# Altium PCB 智能家居-温湿度传感器.PcbDoc
Units mm, origin at the board's own origin, x right, y up, seen from the top; angles counter-clockwise.
Board outline 61.77 x 59.99 mm, 2 copper layers (Top Layer, Bottom Layer); 17 components, 26 nets, 91 pads, 0 vias.
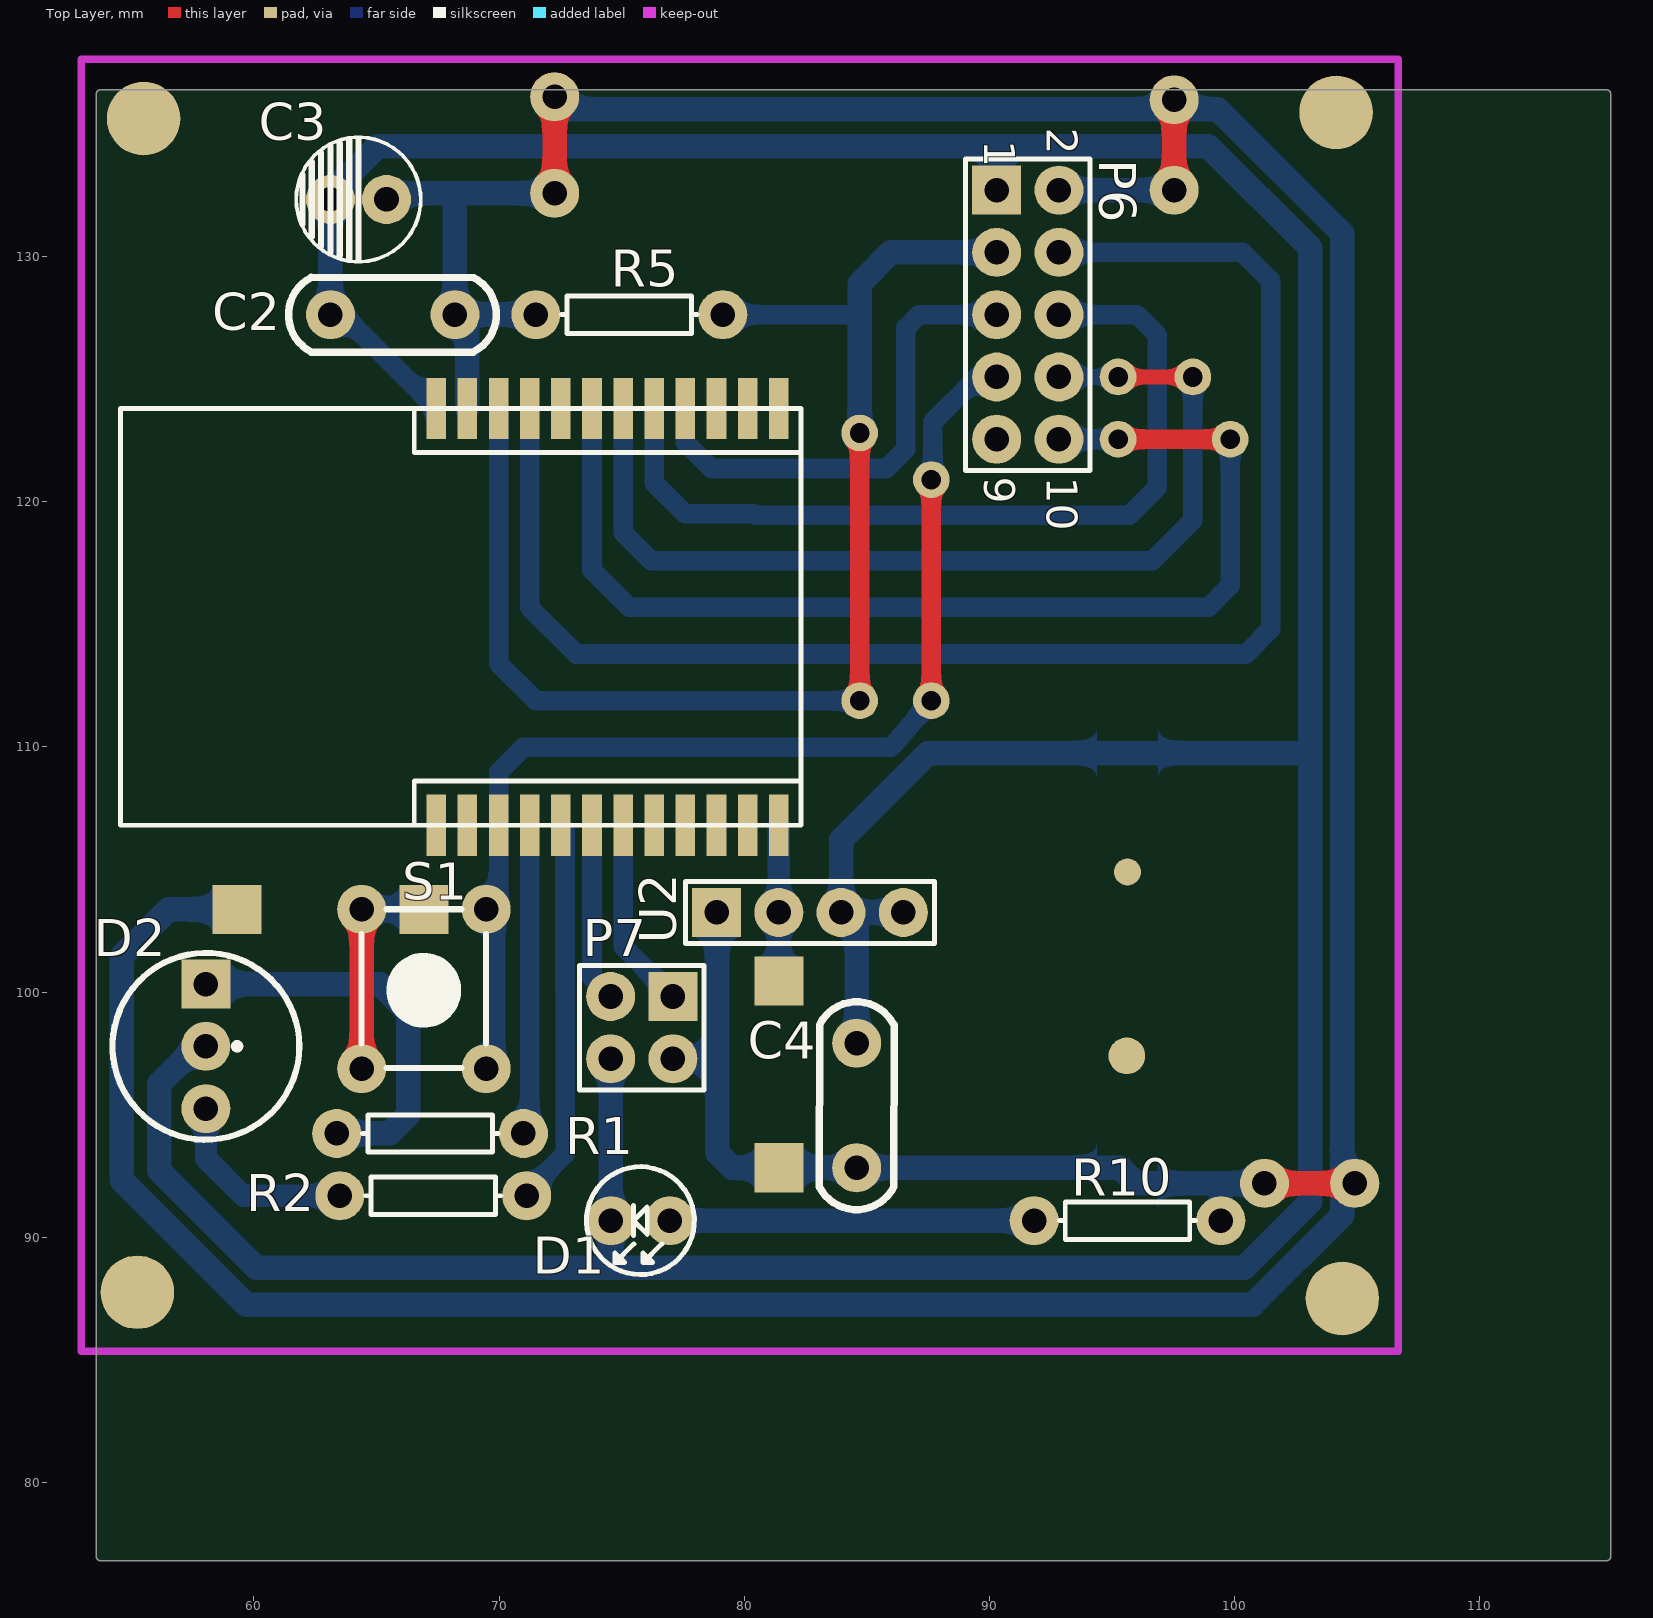
[diagram p0: Top Layer view]
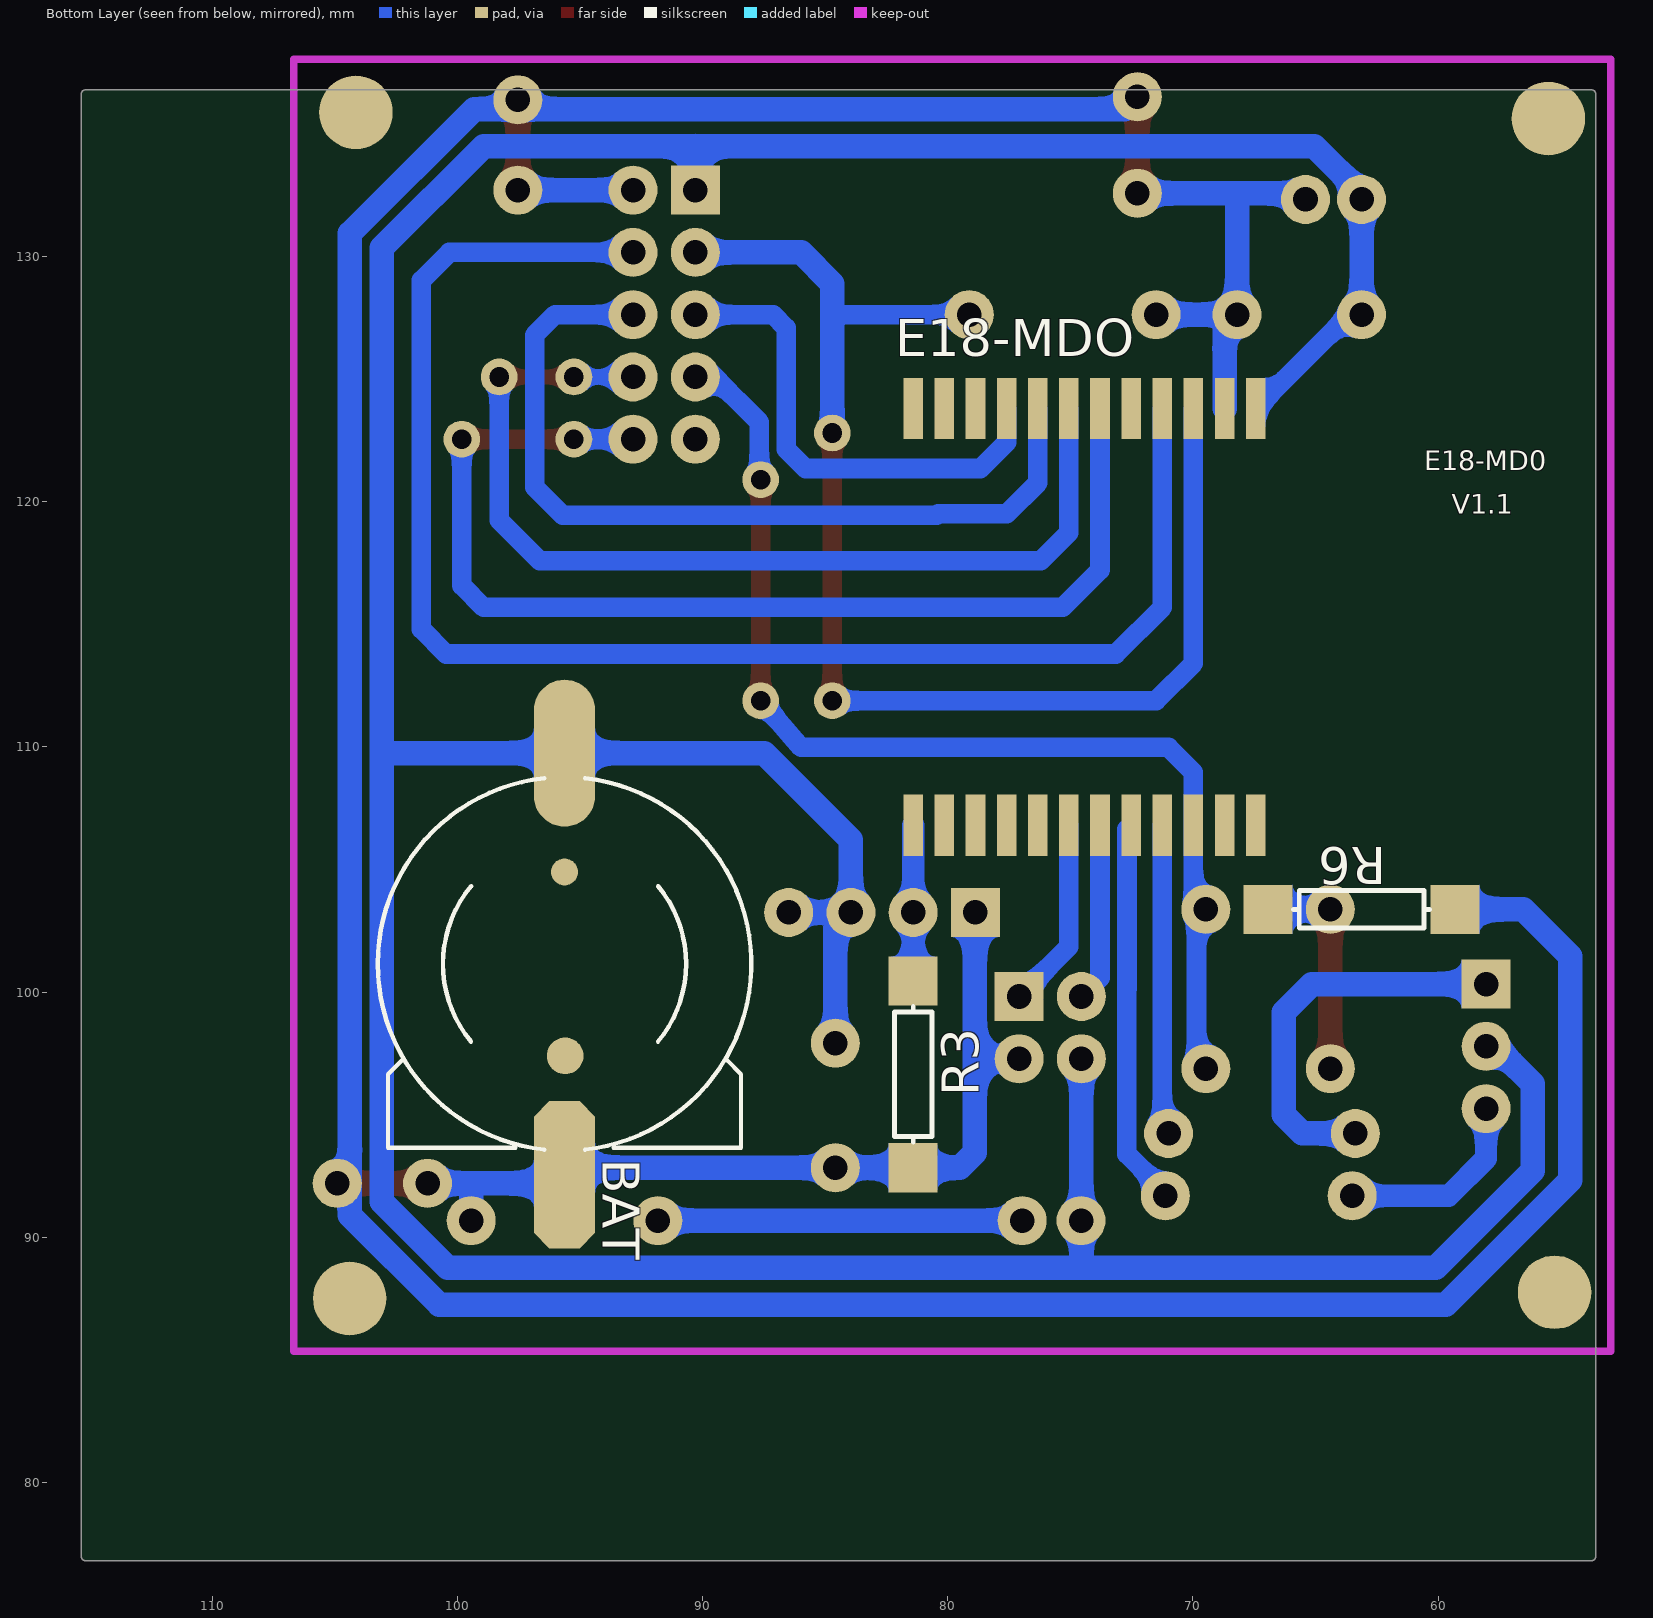
[diagram p1: Bottom Layer view, seen from below]

## Layer stack, top to bottom
Top Solder: solder mask 0.0102, Solder Resist, Dk 3.5
Top Layer: signal copper 0.0356
Dielectric 1: dielectric 0.32, FR-4, Dk 4.8
Bottom Layer: signal copper 0.0356
Bottom Solder: solder mask 0.0102, Solder Resist, Dk 3.5

## Board outline
53.721,76.812 cw(c53.721,76.962) 53.571,76.962 53.571,136.652 cw(c53.721,136.652) 53.721,136.802 115.189,136.802 cw(c115.189,136.652) 115.339,136.652 115.339,76.962 cw(c115.189,76.962) 115.189,76.812

## Design rules (kind name [scope] priority, off if disabled: settings)
Clearance [All] p1: gap=0.3
PolygonConnect [All] p1: connectstyle=Relief reliefconductorwidth=0.254 reliefentries=4 polygonreliefangle="90 Angle" airgapwidth=0.254
RoutingVias [All] p1: holewidth=1 width=2 viastyle="Through Hole" minholewidth=0.711 minwidth=1.27 maxholewidth=0.711 maxwidth=1.27
SolderMaskExpansion [All] p1: expansion=0.102
Width [All] p1: maxlimit=5 minlimit=0.5 preferedwidth=0.8 minimp=50.000000 maximp=50.000000 favimp=50.000000
30 further rules are at their usual default settings.

## Components (designator, comment, footprint, x,y, rotation, side; value= is the part's Value field where it differs from the comment)
BAT "BATT" BATM 95.631,101.154 r180 bottom
C2 "0.01uF" 0.1UF 65.659,127.635 r180 top
C3 "Cap Pol1" CD5 65.405,132.334 r270 top
C4 "104" 0.1UF 84.582,95.377 r270 top
D1 "LED0" LED-3 76.962,90.678 r180 top
D2 "RG-LED-K" RG-LED 58.039,100.33 r270 top
E18-MDO "Zigbee" E18-MD0-1 81.407,122.907 r180 bottom
P6 "程序下载接口" HDR2X5 90.297,132.715 r270 top
P7 "调试接口" HDR2X2 77.089,99.822 r180 top
R1 "100" AXIAL-0.3#1 67.183,94.234 r0 top
R2 "100" AXIAL-0.3#1 67.31,91.694 r0 top
R3 "4.7K" AXIAL-0.3#2 81.407,96.647 r90 bottom
R5 "4.7K" AXIAL-0.3#1 75.311,127.635 r0 top
R6 "4.7K" AXIAL-0.3#2 63.119,103.378 r0 bottom
R10 "Res1" AXIAL-0.3#1 95.631,90.678 r180 top
S1 "SW-PB" KEY_M 69.469,103.378 r270 top
U2 "DHT11" HDR1X4 78.867,103.251 r0 top

## Footprints (in the part's own frame and the unit in brackets; to place one, negate y for a bottom-side part, rotate by r counter-clockwise, add the part's x,y. Pads: shape width x height; smd on the part's side, far side on the other; paste and mask are expansions set on the pad)
0.1UF [mm]
  round 2 hole 1: 1(-2.54,0) 2(2.54,0)
  silkscreen extent -4.22,-1.52 4.25,1.53
AXIAL-0.3#1 [mm] "Axial Device, Thru-Hole; 2 Leads; 0.3 in Pin Spacing"
  round 2 hole 1: 1(-3.81,0) 2(3.81,0)
  silkscreen extent -2.77,-0.76 2.77,0.76
AXIAL-0.3#2 [mm] "Axial Device, Thru-Hole; 2 Leads; 0.3 in Pin Spacing"
  rect 2x2 all layers, no hole: 1(-3.81,0) 2(3.81,0)
  silkscreen extent -2.77,-0.76 2.77,0.76
BATM [mm]
  round 1.1 all layers, no hole: 0(0,3.748)
  round 1.5 all layers, no hole: 0(0.025,-3.752)
  oct 2.5x6 smd: 1(0,-8.602)
  oval 2.5x6 smd: 2(0,8.598)
  silkscreen extent -7.62,-7.58 7.62,7.57
CD5 [mm]
  round 2 hole 1: 1(0,0) 2(0,-2.286)
  silkscreen extent -2.54,-3.68 2.54,1.4
E18-MD0-1 [mm] "Connector; Header; 8 Position"
  rect 0.8x2.5 all layers, no hole: 1(13.97,0.9) 2(12.7,0.9) 3(11.43,0.9) 4(10.16,0.9) 5(8.89,0.9) 6(7.62,0.9) 7(6.35,0.9) 8(5.08,0.9) 9(3.81,0.9) 10(2.54,0.9) 11(1.27,0.9) 12(0,0.9) 13(0,-16.1) 14(1.27,-16.1) 15(2.54,-16.1) 16(3.81,-16.1) 17(5.08,-16.1) 18(6.35,-16.1) 19(7.62,-16.1) 20(8.89,-16.1) 21(10.16,-16.1) 22(11.43,-16.1) 23(12.7,-16.1) 24(13.97,-16.1)
  Top Layer lines w0.22: 0.14,-15.52 cw(c0.116,-15.496) 0.116,-15.53 0.11,-15.53
HDR1X4 [mm]
  rect 2x2 hole 1: 1(0,0)
  round 2 hole 1: 2(2.54,0) 3(5.08,0) 4(7.62,0)
  silkscreen extent -1.27,-1.27 8.89,1.27
HDR2X2 [mm]
  rect 2x2 hole 1: 1(0,0)
  round 2 hole 1: 2(0,2.54) 3(2.54,0) 4(2.54,2.54)
  silkscreen extent -1.27,-1.27 3.81,3.81
HDR2X5 [mm] "Connector; Header; 5x2 Position"
  rect 2x2 hole 1: 1(0,0)
  round 2 hole 1: 2(0,2.54) 3(2.54,0) 4(2.54,2.54) 5(5.08,0) 6(5.08,2.54) 7(7.62,0) 8(7.62,2.54) 9(10.16,0) 10(10.16,2.54)
  silkscreen extent -1.27,-1.27 11.43,3.81
KEY_M [mm]
  round 2 hole 1: 1(0,0) 1(6.5,0) 2(0,-5.08) 2(6.5,-5.08)
  silkscreen extent 0,-5.08 6.48,0
LED-3 [mm]
  round 2 hole 1: 1(0,0) 2(2.4,0)
  silkscreen extent -1,-2.2 3.4,2.2
RG-LED [mm]
  rect 2x2 hole 1: 1(0,0)
  round 2 hole 1: 2(2.54,0) 3(5.08,0)
  silkscreen extent -1.27,-3.81 6.35,3.81

## Part data
BAT: library part BAT
C2 C4: library part C
C3: "Polarized Capacitor (Radial)"
D1: "Typical INFRARED GaAs LED"
E18-MDO: library part E18-MDO, "Zigbee模块"
P6: library part "Header 5X2", "Header, 5-Pin, Dual row"
P7: library part "Header 2X2H", "Header, 2-Pin, Dual row, Right Angle"
R1 R2 R3 R5 R6: library part R
R10: "Resistor"
S1: "Switch"
U2: "数字温湿度传感器"

## Free pads (board coordinates)
  round 3 all layers, no hole: 7(55.245,87.757) 7(55.499,135.636) 7(104.14,135.89) 7(104.394,87.503)
  round 1.5 hole 0.8: 9(84.709,111.887) 9(84.709,122.809) 9(87.63,111.887) 9(87.63,120.904) 9(95.25,122.555) 9(95.25,125.095) 9(98.298,125.095) 9(99.822,122.555)
  round 2 hole 1: 10(72.263,132.588) 10(72.263,136.525) 10(97.536,132.715) 10(97.536,136.398) 10(101.219,92.202) 10(104.902,92.202)

## Nets (pads, with @x,y where several pads share a name; then routed paths per layer and width w, separated by ;. In a path a pad name is that pad's centre, name@x,y a point inside that pad or via, vN(x,y) a via of type N, cw(c..) or ccw(c..) an arc to the next point about the centre after c; other vN are vias at no path point)
DBG_CSN: E18-MDO.9 P6.5 | length 20
  Bottom Layer w0.8: E18-MDO.9 77.597,122.428 78.666,121.359 85.799,121.359 86.587,122.147 86.587,127.1 87.122,127.635 P6.5
DBG_DC: E18-MDO.3 P6.3 pad.9@84.709,111.887 pad.9@84.709,122.809 R5.2 | length 54.6
  Top Layer w0.8: pad.9@84.709,111.887 pad.9@84.709,122.809
  Bottom Layer w0.8: E18-MDO.3 69.977,113.411 71.501,111.887 pad.9@84.709,111.887 ; R5.2 84.328,127.635 84.709,127.254
  Bottom Layer w1: pad.9@84.709,122.809 84.709,127.254 84.709,128.905 85.979,130.175 P6.3
DBG_DIO: E18-MDO.4 P6.4 | length 62.9
  Bottom Layer w0.8: E18-MDO.4 71.247,115.697 73.152,113.792 100.457,113.792 101.473,114.808 101.473,129.032 100.33,130.175 P6.4
DBG_MISO: E18-MDO.6 P6.10 pad.9@95.25,122.555 pad.9@99.822,122.555 | length 46.6
  Top Layer w0.8: pad.9@95.25,122.555 pad.9@99.822,122.555
  Bottom Layer w0.8: E18-MDO.6 73.787,117.221 75.311,115.697 98.933,115.697 99.822,116.586 pad.9@99.822,122.555 ; P6.10 pad.9@95.25,122.555
DBG_MOSI: E18-MDO.7 P6.8 pad.9@95.25,125.095 pad.9@98.298,125.095 | length 40.8
  Top Layer w0.6: pad.9@95.25,125.095 pad.9@98.298,125.095
  Bottom Layer w0.6: P6.8 pad.9@95.25,125.095
  Bottom Layer w0.8: E18-MDO.7 75.057,118.745 76.2,117.602 96.647,117.602 98.298,119.253 pad.9@98.298,125.095
DBG_SCK: E18-MDO.8 P6.6 | length 35.1
  Bottom Layer w0.8: E18-MDO.8 76.327,120.777 77.597,119.507 80.391,119.507 80.444,119.454 95.705,119.454 96.848,120.597 96.848,126.799 96.012,127.635 P6.6
GND: BAT.2 C2.2 C3.2 C4.1 D1.2 D2.2 E18-MDO.1 P6.1 P7.4 U2.3 U2.4 | length 190.2
  Bottom Layer w0.8: C2.2 63.609,127.635 E18-MDO.1
  Bottom Layer w1: D2.2 57.658,97.79 56.134,96.266 56.134,92.71 60.092,88.752 100.396,88.752 103.084,91.44 103.084,109.474 ; C2.2 C3.2 63.119,132.594 65.04,134.515 90.297,134.515 ; 74.549,88.773 P7.4 ; C4.1 84.582,102.616 U2.3 ; U2.4 U2.3 ; P6.1 90.297,134.515 ; U2.3 83.947,106.214 87.485,109.752 BAT.2 102.806,109.752 103.084,109.474 ; 90.297,134.515 98.933,134.515 103.084,130.364 103.084,109.474
LED1: E18-MDO.21 R1.2 | length 12.7
  Bottom Layer w0.8: R1.2 71.247,94.488 E18-MDO.21
LED2: E18-MDO.20 R2.2 | length 15.9
  Bottom Layer w0.8: R2.2@70.993,91.694 72.693,93.394 72.693,100.122 72.687,100.128 72.687,106.637 E18-MDO.20
NetD1_1: D1.1 R10.2 | length 14.9
  Bottom Layer w1: D1.1 R10.2
NetD2_1: D2.1 R1.1 | length 16.2
  Bottom Layer w1: D2.1 65.151,100.33 66.294,99.187 66.294,94.996 65.532,94.234 R1.1
NetD2_3: D2.3 R2.1 | length 8.1
  Bottom Layer w0.9: D2.3 58.039,93.218 59.563,91.694 R2.1
NetR6_2: R6.2 S1.2 | length 9
  Top Layer w1: S1.2@64.389,96.878 S1.2@64.389,103.378
  Bottom Layer w1: S1.2@64.389,103.378 R6.2
P0.2: E18-MDO.19 P7.3 | length 7.3
  Bottom Layer w0.8: E18-MDO.19 73.787,100.584 P7.3
P0.3: E18-MDO.18 P7.1 | length 7.8
  Bottom Layer w0.8: E18-MDO.18 75.057,101.854 P7.1
P0.4: E18-MDO.17
P0.5: E18-MDO.16
P0.6: E18-MDO.15
P0.7: E18-MDO.14
P1.0: E18-MDO.13 R3.2 U2.2 | length 6.3
  Bottom Layer w0.9: R3.2 U2.2 E18-MDO.13
P1.1: E18-MDO.12
P1.2: E18-MDO.11
P1.3: E18-MDO.10
P2.0: E18-MDO.5
RST: E18-MDO.22 P6.7 pad.9@87.63,111.887 pad.9@87.63,120.904 S1.1 | length 45.8
  Top Layer w0.8: pad.9@87.63,111.887 pad.9@87.63,120.904
  Bottom Layer w0.8: S1.1@69.85,96.901 69.85,103.401 69.977,103.528 E18-MDO.22 69.977,108.966 70.993,109.982 85.979,109.982 pad.9@87.63,111.887 ; pad.9@87.63,120.904 87.687,120.961 87.687,123.247 89.535,125.095 P6.7
VCC-3: BAT.1 C2.1 C3.1 C4.2 E18-MDO.2 P6.2 P7.2 pad.10 R3.1 R5.1 R6.1 R10.1 U2.1 | length 213.5
  Top Layer w1: pad.10@72.263,132.588 pad.10@72.263,136.525 ; pad.10@97.536,132.715 pad.10@97.536,136.398 ; pad.10@101.219,92.202 pad.10@104.902,92.202
  Bottom Layer w1: R6.1 56.515,103.378 54.61,101.473 54.61,92.329 59.69,87.249 100.731,87.249 104.384,90.902 104.384,130.947 99.314,136.017 72.771,136.017 pad.10@72.263,136.525 ; C3.1 65.659,132.588 pad.10@72.263,132.588 ; 68.199,132.461 C2.1 C2.1@68.707,127.635 ; E18-MDO.2 C2.1@68.707,127.635 ; R5.1 C2.1@68.707,127.635 ; P7.2 78.889,97.282 ; U2.1 78.889,103.229 78.889,97.282 ; P6.2 pad.10@97.536,132.715 ; R10.1 99.441,91.948 99.187,92.202 ; pad.10@101.219,92.202 99.187,92.202 ; 78.889,97.282 78.889,93.45 79.502,92.837 R3.1 C4.2 95.346,92.837 BAT.1 95.981,92.202 99.187,92.202
pads on no net: BAT.0 E18-MDO.23 E18-MDO.24 P6.9

## Keep-outs
Keep-Out Layer:
  lines w0.3: 52.959,85.344 52.959,138.049 106.68,138.049 106.68,85.344 52.959,85.344

## Silkscreen, mask and mechanical layers (free items; w line width, h text height)
Drill Drawing:
  text ".LEGEND" at 120.118,81.153 h1.52
  text "Drill Drawing." at 120.88,78.74 h1.52

## Dimensions
52.959,85.344 to 52.959,138.049 on Mechanical 1
52.959,85.344 to 106.68,85.344 on Mechanical 1

## Text inside footprints (layer, text, board x,y; h text height)
E18-MDO: Bottom Overlay "E18-MD0" at 60.567,121.287 h0.8; Bottom Overlay "V1.1" at 59.437,119.517 h0.8
P6: Top Overlay "2" at 92.329,135.255 h1.27 r270; Top Overlay "1" at 89.789,134.747 h1.27 r270; Top Overlay "9" at 89.789,121.031 h1.27 r270; Top Overlay "10" at 92.329,121.031 h1.27 r270